# EAGLE board base2 (EAGLE 6.5.0)
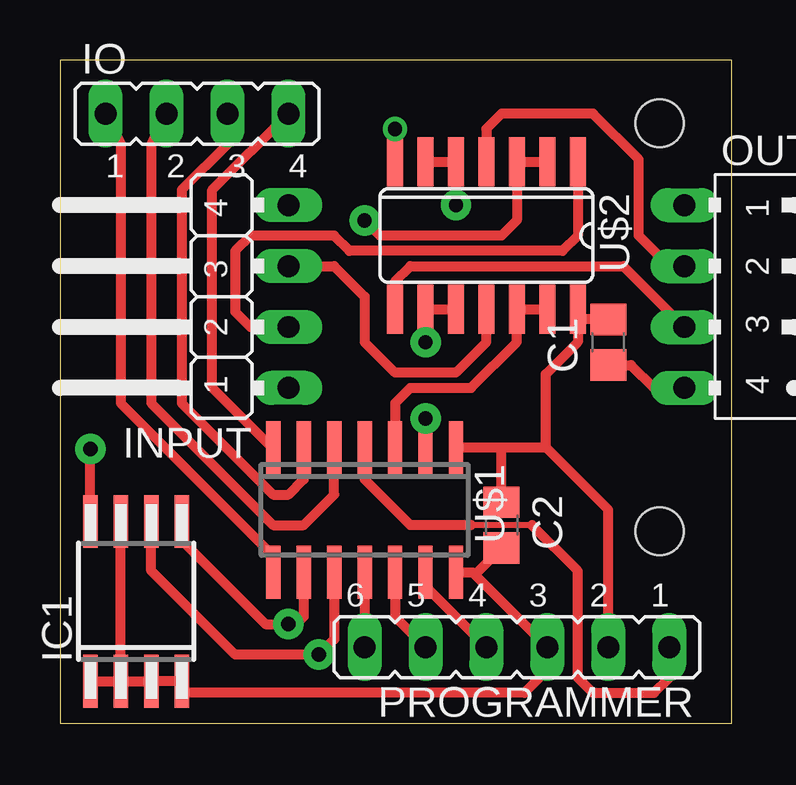
[diagram p0: board, top side]
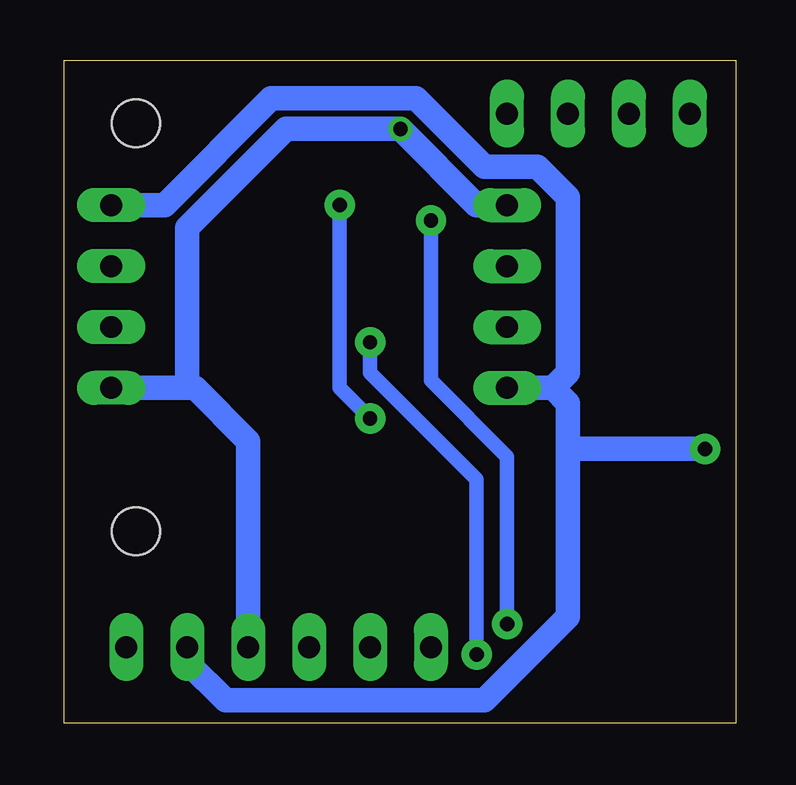
[diagram p1: board, bottom side, seen from below]

Size 28 x 27.64 mm. Coordinates in mm from the lower left corner, seen from the top.
Outline: 0,0 28,0 28,27.64 0,27.64 0,0
Copper layers (1*16): Top 0.035mm / dielectric 1.5mm / Bottom 0.035mm
Design rules "default": minimum track width 10mil, minimum drill 24mil, track to track 8mil, track to pad 8mil, pad to pad 8mil, via to via 8mil, smd to smd 8mil, copper to edge 40mil, drill to drill 8mil, minimum pad ring 10mil, minimum via ring 8mil, stop-mask expansion 4mil, vias tented up to drill 0mil, thermal gap 10mil
Holes 2 mm at 25,25 25,8

## Footprints (pad centres in the part's own frame; a part is rotated, then mirrored left to right if it is on the bottom)
C0805 = smd 1.3 x 1.5: 1 -0.95,0; 2 0.95,0
SO-08M = smd 0.6 x 2.2: 1 -1.905,-3.33; 2 -0.635,-3.33; 3 0.635,-3.33; 4 1.905,-3.33; 5 1.905,3.33; 6 0.635,3.33; 7 -0.635,3.33; 8 -1.905,3.33
JUMPER4 = drill 0.914 long: 1 -2.54,-2.54; 2 0,-2.54; 3 2.54,-2.54; 4 5.08,-2.54
JUMPER4M = drill 0.914 long: 1 -3.81,0; 2 -1.27,0; 3 1.27,0; 4 3.81,0
JUMPER4F = drill 0.914 long: 1 -3.81,-2.54; 2 -1.27,-2.54; 3 1.27,-2.54; 4 3.81,-2.54
JUMPER6M = drill 0.914 long: 1 -6.35,0; 2 -3.81,0; 3 -1.27,0; 4 1.27,0; 5 3.81,0; 6 6.35,0
16F1503 = smd 0.6 x 2.2: 1 -3.81,-2.6; 2 -2.54,-2.6; 3 -1.27,-2.6; 4 0,-2.6; 5 1.27,-2.6; 6 2.54,-2.6; 7 3.81,-2.6; 8 3.81,2.6; 9 2.54,2.6; 10 1.27,2.6; 11 0,2.6; 12 -1.27,2.6; 13 -2.54,2.6; 14 -3.81,2.6
SO14 = smd 0.66 x 2.032: 1 -3.81,-3.073; 2 -2.54,-3.073; 3 -1.27,-3.073; 4 0,-3.073; 5 1.27,-3.073; 6 2.54,-3.073; 7 3.81,-3.073; 8 3.81,3.073; 9 2.54,3.073; 10 1.27,3.073; 11 0,3.073; 12 -1.27,3.073; 13 -2.54,3.073; 14 -3.81,3.073

## Placement (x,y rotation side)
C1  100nF  [C0805]  22.86,15.88 90 top
C2  100nF  [C0805]  18.41,8.26 270 top
IC1  24C02ASM  [SO-08M]  3.17,5.08 0 top
INPUT  [JUMPER4]  6.99,16.51 90 top
IO  [JUMPER4M]  5.71,25.4 0 top
OUTPUT  [JUMPER4F]  28.57,17.78 270 top
PROGRAMMER  [JUMPER6M]  19.05,3.17 180 top
U$1  16F1503  [16F1503]  12.7,8.89 180 top
U$2  4016  [SO14]  17.78,20.32 180 top

## Library data of the parts
C1 C2 = rcl
IC1 = microchip; MF: MICROCHIP; MPN: 24C02C/SN; OC_FARNELL: 1084339; OC_NEWARK: 96K4065
INPUT IO OUTPUT PROGRAMMER U$1 U$2 = !stavebnice03

## Nets
GND: C1.1 C2.2 IC1.1 IC1.2 IC1.3 IC1.4 IC1.7 INPUT.4 OUTPUT.4 PROGRAMMER.3 U$1.14 U$2.7
N$3: OUTPUT.2 U$2.4
N$4: IC1.6 U$1.10 U$2.9 U$2.10
N$5: U$1.2 U$2.5 U$2.6
N$6: U$1.3 U$2.12 U$2.13
N$7: IC1.5 U$1.9 U$2.2 U$2.3
N$8: INPUT.2 U$2.1
N$9: OUTPUT.3 U$2.8
N$10: INPUT.3 U$2.11
N$11: PROGRAMMER.6 U$1.11
N$12: IO.2 U$1.5
N$13: PROGRAMMER.1 U$1.4
N$14: PROGRAMMER.4 U$1.13
N$15: PROGRAMMER.5 U$1.12
N$16: IO.4 U$1.7
N$17: IO.3 U$1.6
N$18: IO.1 U$1.8
VCC: C1.2 C2.1 IC1.8 INPUT.1 OUTPUT.1 PROGRAMMER.2 U$1.1 U$2.14

## Tracks (layer width: path | path; a pad name or v marks a point on that pad's centre or on a via)
GND  (via drill 0.6 pad 1.02)
  Top 0.254: 17.2,6.29 17.4,6.29
  Top 0.406: U$1.14 17.2,6.29 PROGRAMMER.3 20.32,2.22 19.37,1.27 5.08,1.27 IC1.4 IC1.3 IC1.2 | U$2.7 v13.97,24.77 | 17.4,6.29 C2.2 | C1.1 23.81,14.93 24.77,13.97 OUTPUT.4 | IC1.1 IC1.2 | IC1.2 IC1.7
  Bottom 1.016: 22.86,13.97 22.54,13.97 20.32,11.75 PROGRAMMER.3 | INPUT.4 10.79,21.59 v13.97,24.77 18.73,24.77 22.86,20.64 22.86,13.97 | 22.86,13.97 OUTPUT.4
N$3
  Top 0.406: OUTPUT.2 25.4,19.05 24.13,20.32 24.13,23.5 22.23,25.4 18.41,25.4 17.78,24.77 U$2.4
N$4  (via drill 0.6 pad 1.27)
  Top 0.406: U$1.10 11.43,3.49 v10.79,2.86 7.3,2.86 3.81,6.35 IC1.6 | v15.24,15.88 U$2.9 U$2.10
  Bottom 0.61: v15.24,15.88 15.24,14.61 10.79,10.16 v10.79,2.86
N$5  (via drill 0.6 pad 1.27)
  Top 0.254: U$2.6 U$2.5 16.51,23.5 16.41,23.39
  Top 0.406: U$2.6 16.41,23.39 | U$2.5 v16.51,21.59 | v15.24,12.7 U$1.2
  Bottom 0.61: v16.51,21.59 16.51,13.97 v15.24,12.7
N$6
  Top 0.254: U$2.13 20.32,16.51
  Top 0.406: U$1.3 13.97,13.34 14.61,13.97 17.14,13.97 19.05,15.88 U$2.12 U$2.13
N$7  (via drill 0.6 pad 1.27)
  Top 0.254: 9.84,4.13 v9.53,4.13
  Top 0.406: U$2.2 U$2.3 19.05,20.95 18.41,20.32 13.34,20.32 v12.7,20.95 | U$1.9 10.16,4.45 9.84,4.13 | IC1.5 5.08,7.62 8.57,4.13 v9.53,4.13
  Bottom 0.61: v9.53,4.13 9.53,11.11 12.7,14.29 v12.7,20.95
N$8
  Top 0.406: U$2.1 21.59,20.32 20.95,19.68 12.06,19.68 11.43,20.32 7.94,20.32 7.3,19.68 7.3,17.14 7.94,16.51 INPUT.2
N$9
  Top 0.406: U$2.8 13.97,18.41 14.61,19.05 23.5,19.05 OUTPUT.3
N$10
  Top 0.406: INPUT.3 11.43,19.05 12.7,17.78 12.7,15.88 13.97,14.61 16.51,14.61 17.78,15.88 U$2.11
N$11
  Top 0.406: U$1.11 PROGRAMMER.6
N$12
  Top 0.406: IO.2 3.81,24.13 3.81,13.34 8.89,8.26 10.16,8.26 11.43,9.53 U$1.5
N$13
  Top 0.254: 19.68,8.26 17.14,8.26
  Top 0.406: U$1.4 12.7,10.16 14.61,8.26 17.14,8.26 | PROGRAMMER.1 25.4,1.91 24.77,1.27 22.23,1.27 21.59,1.91 21.59,6.35 19.68,8.26
N$14
  Top 0.254: U$1.13 15.24,5.71
  Top 0.406: 15.24,5.71 PROGRAMMER.4
N$15
  Top 0.406: U$1.12 13.97,4.45 PROGRAMMER.5
N$16
  Top 0.254: U$1.7 8.83,11.49
  Top 0.406: 8.83,11.49 6.35,13.97 6.35,22.23 IO.4
N$17
  Top 0.406: IO.3 6.99,24.13 5.08,22.23 5.08,13.34 8.89,9.53 9.53,9.53 10.16,10.16 U$1.6
N$18
  Top 0.254: 8.89,6.35 8.83,6.35 U$1.8 8.89,6.99
  Top 0.406: IO.1 2.54,24.13 2.54,13.34 8.89,6.99
VCC  (via drill 0.6 pad 1.27)
  Top 0.254: U$2.14 21.59,16.51 21.91,16.82
  Top 0.406: 21.59,16.51 21.59,15.88 20.26,14.54 20.26,11.49 | U$1.1 18.41,11.49 | 18.41,11.49 20.26,11.49 | C2.1 18.41,11.49 | C1.2 21.91,16.82 | IC1.8 v1.27,11.43 | PROGRAMMER.2 22.86,8.89 20.26,11.49
  Bottom 1.016: 7.62,13.97 6.99,14.61 6.99,21.91 8.26,23.18 10.48,23.18 13.34,26.04 19.37,26.04 23.81,21.59 OUTPUT.1 | 7.62,13.97 INPUT.1 | 6.99,11.43 6.99,4.45 10.48,0.95 21.27,0.95 22.86,2.54 PROGRAMMER.2 | 6.99,11.43 6.99,13.34 7.62,13.97 | v1.27,11.43 6.99,11.43